# EAGLE board CCM_0016 (EAGLE 8.6.0)
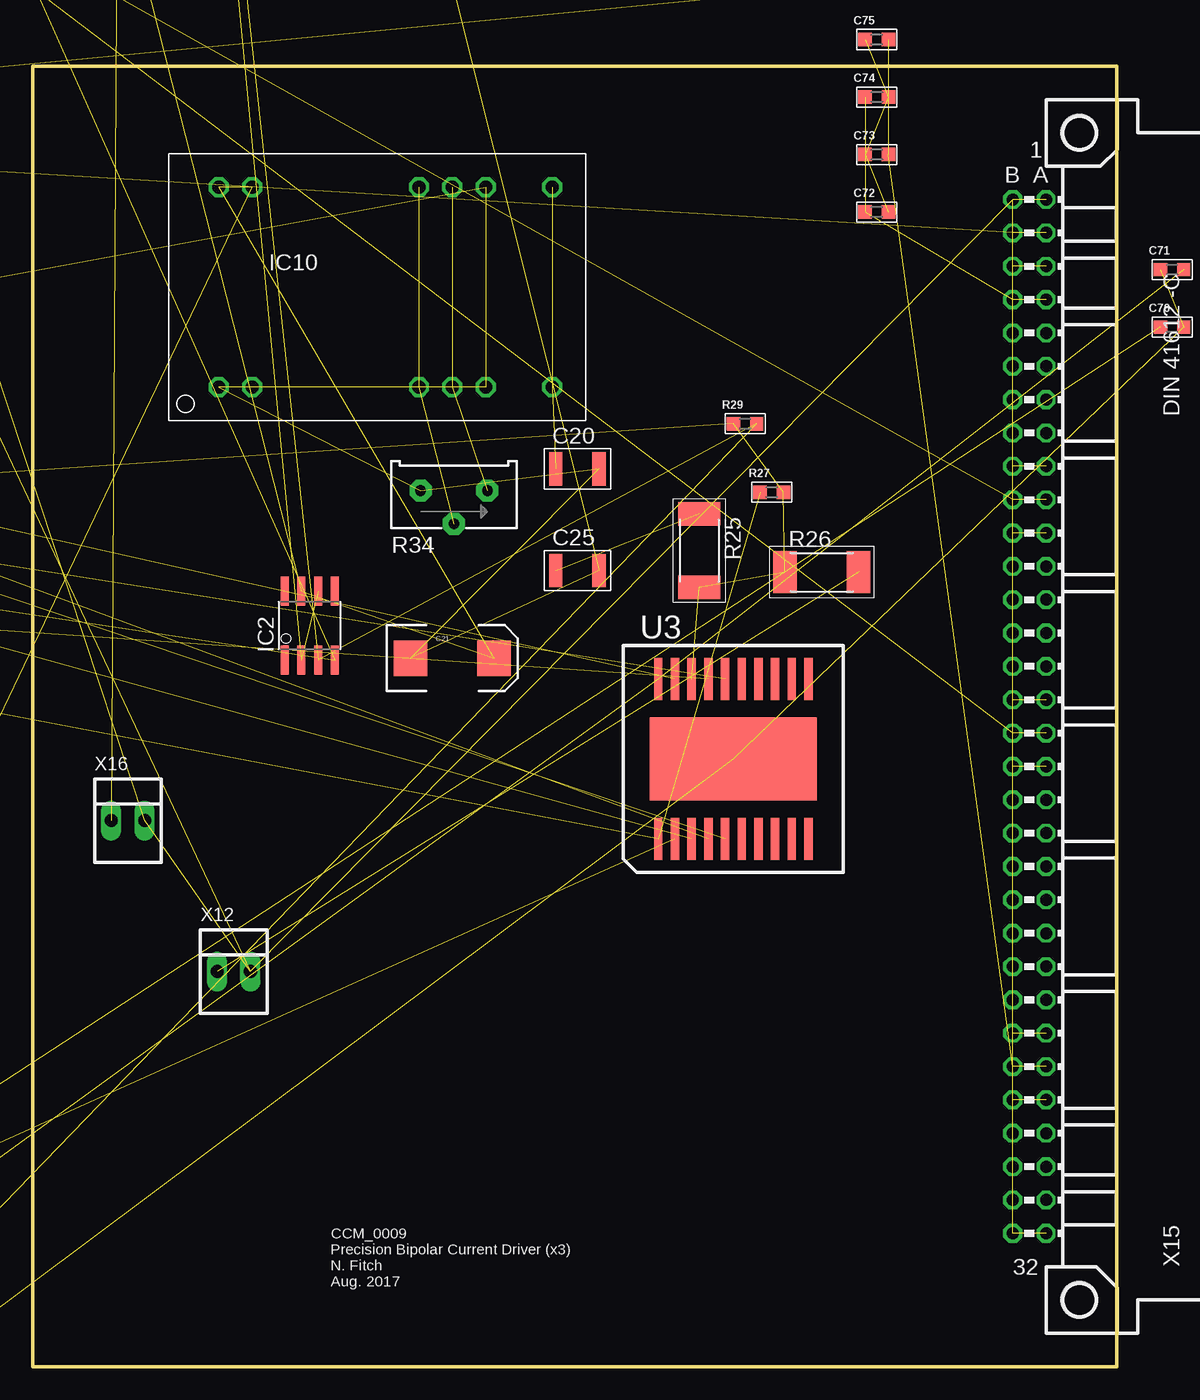
[diagram p0: board, top side]
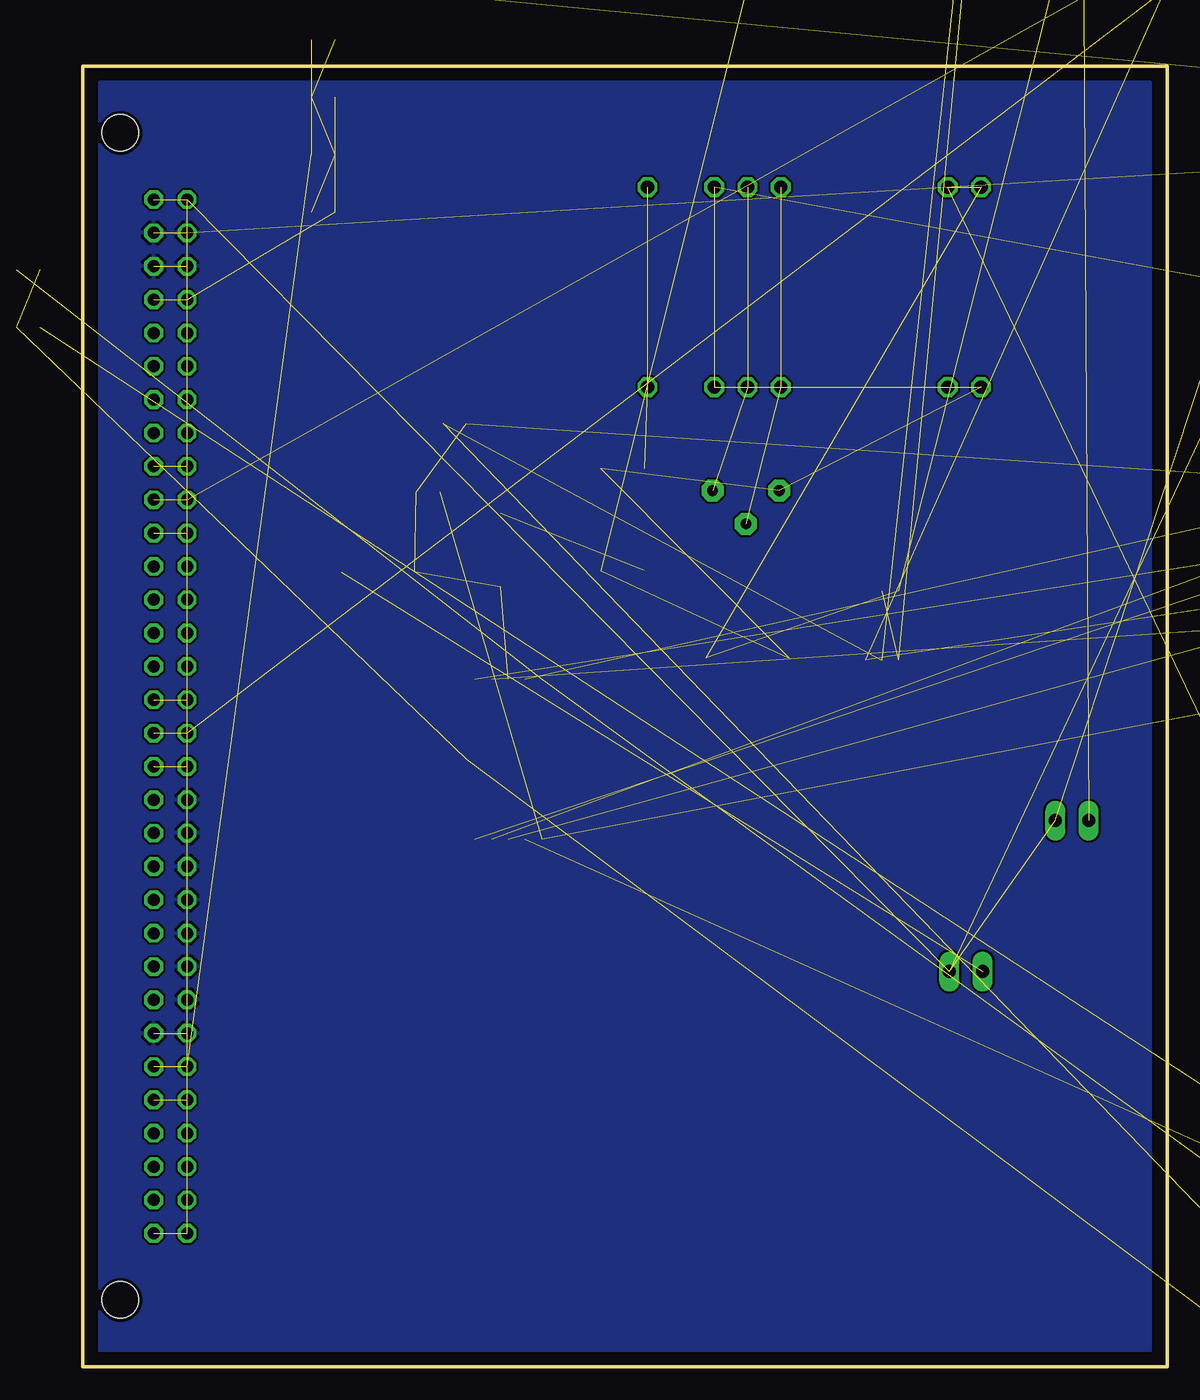
[diagram p1: board, bottom side, seen from below]

Size 82.55 x 99.06 mm. Coordinates in mm from the lower left corner, seen from the top.
Outline: 0,0 82.55,0 82.55,99.06 0,99.06 0,0
Copper layers (1*16): Top 0.035mm / dielectric 1.5mm / Bottom 0.035mm
Design rules "default *": minimum track width 10mil, minimum drill 10mil, track to track 7mil, track to pad 7mil, pad to pad 7mil, via to via 7mil, smd to smd 7mil, copper to edge 10mil, drill to drill 8mil, minimum pad ring 10mil, minimum via ring 8mil, stop-mask expansion 4mil, vias tented up to drill 0mil, thermal gap 10mil
Net classes: 1 standard: width 0.61 mm, clearance 0.254 mm

## Footprints (pad centres in the part's own frame; a part is rotated, then mirrored left to right if it is on the bottom)
0603 = smd 1.016 x 1.016: 1 -0.889,0; 2 0.889,0
1210 = smd 1.016 x 2.54: 1 -1.651,0; 2 1.651,0
EIA7343 = smd 2.55 x 2.7: A 3.17,0; C -3.17,0
SOT23 = smd 1 x 1.4: 1 -0.95,-1.1; 2 0.95,-1.1; 3 0,1.1
SO08 = smd 0.61 x 2.21: 1 -1.905,-2.616; 2 -0.635,-2.616; 3 0.635,-2.616; 4 1.905,-2.616; 5 1.905,2.616; 6 0.635,2.616; 7 -0.635,2.616; 8 -1.905,2.616
RXXDIP = drill 1 octagon: 2 -12.7,-7.62; 3 -10.16,-7.62; 8 2.54,-7.62; 9 5.08,-7.62; 10 7.62,-7.62; 12 12.7,-7.62; 13 12.7,7.62; 15 7.62,7.62; 16 5.08,7.62; 17 2.54,7.62; 22 -10.16,7.62; 23 -12.7,7.62
2512 = smd 1.8 x 3.2: 1 -2.8,0; 2 2.8,0
3386H = drill 0.813 pad 1.676 octagon: 1 -2.54,0.635; 2 0,-1.905; 3 2.54,0.635
PSOP-20 = smd 0.635 x 3.175: 1 -5.715,-6.096; 2 -4.445,-6.096; 3 -3.175,-6.096; 4 -1.905,-6.096; 5 -0.635,-6.096; 6 0.635,-6.096; 7 1.905,-6.096; 8 3.175,-6.096; 9 4.445,-6.096; 10 5.715,-6.096; 11 5.715,6.096; 12 4.445,6.096; 13 3.175,6.096; 14 1.905,6.096; 15 0.635,6.096; 16 -0.635,6.096; 17 -1.905,6.096; 18 -3.175,6.096; 19 -4.445,6.096; 20 -5.715,6.096 | smd 12.7 x 6.35: PAD 0,0
22-23-2021 = drill 1 long: 1 -1.27,0; 2 1.27,0
MAB64 = drill 0.914 octagon: A1 -2.54,39.37; A2 -2.54,36.83; A3 -2.54,34.29; A4 -2.54,31.75; A5 -2.54,29.21; A6 -2.54,26.67; A7 -2.54,24.13; A8 -2.54,21.59; A9 -2.54,19.05; A10 -2.54,16.51; A11 -2.54,13.97; A12 -2.54,11.43; A13 -2.54,8.89; A14 -2.54,6.35; A15 -2.54,3.81; A16 -2.54,1.27; A17 -2.54,-1.27; A18 -2.54,-3.81; A19 -2.54,-6.35; A20 -2.54,-8.89; A21 -2.54,-11.43; A22 -2.54,-13.97; A23 -2.54,-16.51; A24 -2.54,-19.05; A25 -2.54,-21.59; A26 -2.54,-24.13; A27 -2.54,-26.67; A28 -2.54,-29.21; A29 -2.54,-31.75; A30 -2.54,-34.29; A31 -2.54,-36.83; A32 -2.54,-39.37; B1 -5.08,39.37; B2 -5.08,36.83; B3 -5.08,34.29; B4 -5.08,31.75; B5 -5.08,29.21; B6 -5.08,26.67; B7 -5.08,24.13; B8 -5.08,21.59; B9 -5.08,19.05; B10 -5.08,16.51; B11 -5.08,13.97; B12 -5.08,11.43; B13 -5.08,8.89; B14 -5.08,6.35; B15 -5.08,3.81; B16 -5.08,1.27; B17 -5.08,-1.27; B18 -5.08,-3.81; B19 -5.08,-6.35; B20 -5.08,-8.89; B21 -5.08,-11.43; B22 -5.08,-13.97; B23 -5.08,-16.51; B24 -5.08,-19.05; B25 -5.08,-21.59; B26 -5.08,-24.13; B27 -5.08,-26.67; B28 -5.08,-29.21; B29 -5.08,-31.75; B30 -5.08,-34.29; B31 -5.08,-36.83; B32 -5.08,-39.37 | hole 2.794: 0,44.45; 0,-44.45

## Placement (x,y rotation side)
C14  47p  [0603]  -23.24,-5.91 0 top  (outside the outline)
C15  100p  [0603]  6.1,204.85 0 top  (outside the outline)
C16  10p*250V  [0603]  -91.19,88.39 0 top  (outside the outline)
C17  10p*250V  [0603]  -91.19,84.01 0 top  (outside the outline)
C18  33p*250V  [0603]  -91.19,70.87 0 top  (outside the outline)
C20  4700p*250V  [1210]  41.47,68.39 0 top
C21  47uF*25V  [EIA7343]  31.94,53.98 0 top
C25  0.1u*250V  [1210]  41.47,60.64 0 top
C63  0.1u  [0603]  -10.92,181.23 0 top  (outside the outline)
C64  0.1u  [0603]  -30.86,176.85 0 top  (outside the outline)
C65  0.1u  [0603]  -30.86,172.47 0 top  (outside the outline)
C66  0.1u  [0603]  -30.86,168.08 0 top  (outside the outline)
C67  0.1u  [0603]  -30.86,163.7 0 top  (outside the outline)
C68  0.1u  [0603]  -30.86,129.16 0 top  (outside the outline)
C69  0.1u  [0603]  -30.86,124.78 0 top  (outside the outline)
C70  4.7u  [0603]  86.74,79.18 0 top  (outside the outline)
C71  4.7u  [0603]  86.74,83.57 0 top  (outside the outline)
C72  0.1u  [0603]  64.26,87.95 0 top
C73  0.1u  [0603]  64.26,92.33 0 top
C74  4.7u  [0603]  64.26,96.71 0 top
C75  4.7u  [0603]  64.26,101.09 0 top
C76  0.1u  [0603]  64.26,105.47 0 top  (outside the outline)
C77  0.1u  [0603]  -53.34,-27.18 0 top  (outside the outline)
C78  4.7u  [0603]  64.26,114.24 0 top  (outside the outline)
C79  0.1u  [0603]  -53.34,-31.56 0 top  (outside the outline)
D1  BAT54S  [SOT23]  5.97,198.82 0 top  (outside the outline)
D6  LM4040-10.0V  [SOT23]  -11.05,191.39 0 top  (outside the outline)
D9  BAT54S  [SOT23]  -53.53,95.12 0 top  (outside the outline)
IC2  AD8675  [SO08]  21.08,56.45 0 top
IC10  R15-150B  [RXXDIP]  26.86,82.23 0 top
IC11  AD8675  [SO08]  -21.27,6.29 0 top  (outside the outline)
R16  100  [0603]  6.1,213.61 0 top  (outside the outline)
R17  1k  [0603]  6.1,209.23 0 top  (outside the outline)
R18  5.1k  [0603]  -23.24,-10.29 0 top  (outside the outline)
R19  10k  [0603]  -10.92,185.61 0 top  (outside the outline)
R23  3k  [0603]  -91.19,92.77 0 top  (outside the outline)
R24  5.1k  [0603]  -91.19,66.48 0 top  (outside the outline)
R25  10  [2512]  50.74,62.17 270 top
R26  1  [2512]  60.07,60.52 0 top
R27  100k  [0603]  56.26,66.61 0 top
R29  100k  [0603]  54.23,71.82 0 top
R31  3k  [0603]  -91.19,79.63 0 top  (outside the outline)
R32  100k  [0603]  -91.19,75.25 0 top  (outside the outline)
R33  100  [0603]  -91.19,62.1 0 top  (outside the outline)
R34  5k  [3386H]  32.07,66.1 0 top
U3  PA78  [PSOP-20]  53.34,46.29 0 top
X1  22-23-2021  [22-23-2021]  92.96,69.34 0 top  (outside the outline)
X12  22-23-2021  [22-23-2021]  15.3,30.1 0 top
X15  MAB64  [MAB64]  79.69,49.53 0 top
X16  22-23-2021  [22-23-2021]  7.24,41.59 0 top

## Library data of the parts
C14-C18 C21 C63-C79 R16-R19 R23 R24 R27 R29 R31-R33 = acrooptics
C20 C25 IC2 IC11 R25 R26 U3 X15 = noah
D1 D9 = diode
D6 = Fitch
IC10 = custom_parts
R34 = bourns
X1 X12 X16 = con-molex; MF: MOLEX; MPN: 22-23-2021; OC_FARNELL: 1462926; OC_NEWARK: 25C3832

## Nets
3.3V: C76.1 C78.1
+5V: C72.1 C74.1 X15.A4 X15.B4
+15V: C21.A C64.1 C66.1 C68.1 C70.1 C77.1 IC2.7 IC10.22 IC10.23 IC11.7 R19.1 X15.A17 X15.B17
-5V: C73.2 C75.2 X15.A27 X15.B27
-15V: C18.2 C65.2 C67.2 C69.2 C71.2 C79.2 IC2.4 IC11.4 U3.20 X15.A10 X15.B10
AGND: C15.2 C20.2 C21.C C25.2 C63.2 C64.2 C65.1 C66.2 C67.1 C68.2 C69.1 C70.2 C71.1 C77.2 C79.1 D1.1 D6.2 D9.3 IC10.2 IC10.3 IC10.10 IC10.15 R18.2 R24.1 R34.1 U3.PAD X12.2 X15.A1 X15.A9 X15.A11 X15.A16 X15.A18 X15.A28 X15.A32 X15.B1 X15.B9 X15.B11 X15.B16 X15.B18 X15.B28 X15.B32 X16.2
AGND1: C72.2 C73.1 C74.2 C75.1
AN0: X15.A29
AN1: X15.B29
AN2: X15.A30
AN3: X15.B30
AN4: X15.A31
AN5: X15.B31
CAVITY_DRIVE_RAW: C14.1 IC11.6 U3.2
GND: C76.2 C78.2 D9.1 D9.2 X15.A2 X15.A3 X15.A26 X15.B2 X15.B3 X15.B19 X15.B20 X15.B21 X15.B22 X15.B23 X15.B24 X15.B25 X15.B26
GPIO0: X15.A5
GPIO1: X15.B5
GPIO2: X15.A6
GPIO3: X15.B6
GPIO4: X15.A7
GPIO5: X15.B7
GPIO6: X15.A8
GPIO7: X15.B8
GPIO8: X15.A12
GPIO9: X15.B12
GPIO10: X15.A13
GPIO11: X15.B13
GPIO12: X15.A14
GPIO13: X15.B14
GPIO14: X15.A15
GPIO15: X15.B15
I2C_CLK: X15.A22
I2C_DAT: X15.A23
N$2: R16.2
N$5: IC2.2 IC2.6 R16.1
N$7: R17.2 X16.1
N$8: C63.1 D1.2 D6.1 R19.2
N$20: C14.2 D1.3 IC2.3 IC11.2 R18.1 R29.2
N$21: C15.1 IC11.3 R17.1
N$22: R26.2 X12.1
N$31: C16.1 R23.1
N$34: C25.1 R25.1
N$35: R33.2 U3.17
N$36: R25.2 R26.1 R27.2 R29.1 R33.1 U3.18
N$37: R23.2 U3.4
N$38: R24.2 R27.1 U3.1
N$39: C16.2 U3.5
N$42: R31.1 U3.3
N$43: C17.1 C18.1 R32.2 U3.19
N$44: C17.2 R31.2
N$45: IC10.9 IC10.16 R34.3
N$46: IC10.8 IC10.17 R34.2
SPI_CLK: X15.A19
SPI_MISO: X15.A21
SPI_MOSI: X15.A20
UC_RX: X15.A25
UC_TX: X15.A24
VOUT2: C20.1 IC10.12 IC10.13
VPP: R32.1 U3.16

## Tracks (layer width: path | path; a pad name or v marks a point on that pad's centre or on a via)
3.3V  (1 unrouted)
+5V  (3 unrouted)
+15V  (12 unrouted)
-5V  (3 unrouted)
-15V  (10 unrouted)
AGND  (41 unrouted)
AGND1  (3 unrouted)
CAVITY_DRIVE_RAW  (2 unrouted)
GND  (16 unrouted)
  pour Bottom: 1.27,1.27 1.27,97.79 81.28,97.79 81.28,1.27
N$5  (2 unrouted)
N$7  (1 unrouted)
N$8  (3 unrouted)
N$20  (5 unrouted)
N$21  (2 unrouted)
N$22  (1 unrouted)
N$31  (1 unrouted)
N$34  (1 unrouted)
N$35  (1 unrouted)
N$36  (5 unrouted)
N$37  (1 unrouted)
N$38  (2 unrouted)
N$39  (1 unrouted)
N$42  (1 unrouted)
N$43  (3 unrouted)
N$44  (1 unrouted)
N$45  (2 unrouted)
N$46  (2 unrouted)
VOUT2  (2 unrouted)
VPP  (1 unrouted)

## Text on the board
tPlace: CCM_0009 / Precision Bipolar Current Driver (x3) / N. Fitch / Aug. 2017